# EAGLE board ReferenceBuildingAmp (EAGLE 9.6.2)

No outline drawn. Coordinates in mm, seen from the top.
Copper layers (1*16): Top 0.035mm / dielectric 1.5mm / Bottom 0.035mm
Design rules "default": minimum track width 6mil, minimum drill 0.35mm, track to track 6mil, track to pad 6mil, pad to pad 6mil, via to via 6mil, smd to smd 6mil, copper to edge 40mil, drill to drill 6mil, minimum pad ring 10mil, minimum via ring 8mil, stop-mask expansion 4mil, vias tented up to drill 0mil, thermal gap 10mil

## Footprints (pad centres in the part's own frame; a part is rotated, then mirrored left to right if it is on the bottom)
C2.5-2 = drill 0.813 pad 1.6 octagon: 1 -1.27,0; 2 1.27,0
0204/5 = drill 0.813 octagon: 1 -2.54,0; 2 2.54,0
DIP794W45P254L959H508Q8 = drill 0.78 pad 1.13 square: 1 -3.97,3.81 | drill 0.78 pad 1.13: 2 -3.97,1.27; 3 -3.97,-1.27; 4 -3.97,-3.81; 5 3.97,-3.81; 6 3.97,-1.27; 7 3.97,1.27; 8 3.97,3.81

## Placement (x,y rotation side)
C4  [C2.5-2]  7.62,11.43 0 top
R5  [0204/5]  46.99,29.21 0 top
R6  [0204/5]  39.37,25.4 0 top
U2  TL081CP  [DIP794W45P254L959H508Q8]  20.32,27.94 0 top

## Library data of the parts
C4 = capacitor-wima
R5 R6 = rcl; SPICEPREFIX: R
U2 = TL081CP; AVAILABILITY: In Stock; CHECK_PRICES: https://www.snapeda.com/parts/TL081CP/Texas+Instruments/view-part/?ref=eda; DESCRIPTION: Single, 30-V, 3-MHz, 13-V/µs slew rate, In to V+, JFET-input op amp; MF: Texas Instruments; MP: TL081CP; PACKAGE: PDIP-8 Texas; PRICE: None; PURCHASE-URL: https://www.snapeda.com/api/url_track_click_mouser/?unipart_id=51607&manufacturer=Texas Instruments&part_name=TL081CP&search_term=tl081; SNAPEDA_LINK: https://www.snapeda.com/parts/TL081CP/Texas+Instruments/view-part/?ref=snap

## Nets
3IN+: R5.1 R6.2 U2.3
GND: C4.1 R6.1
N$10: U2.4
N$11: U2.7
VDD: C4.2 R5.2
VREF: U2.2 U2.6

## Tracks (layer width: path | path; a pad name or v marks a point on that pad's centre or on a via)
3IN+  (2 unrouted)
GND  (1 unrouted)
VDD  (1 unrouted)
VREF  (1 unrouted)